# Altium PCB PCBSDC.PcbDoc
Units mm, origin at the board's own origin, x right, y up, seen from the top; angles counter-clockwise.
Board outline 120 x 150 mm, 2 copper layers (Top Layer, Bottom Layer); 28 components, 35 nets, 119 pads, 47 vias.
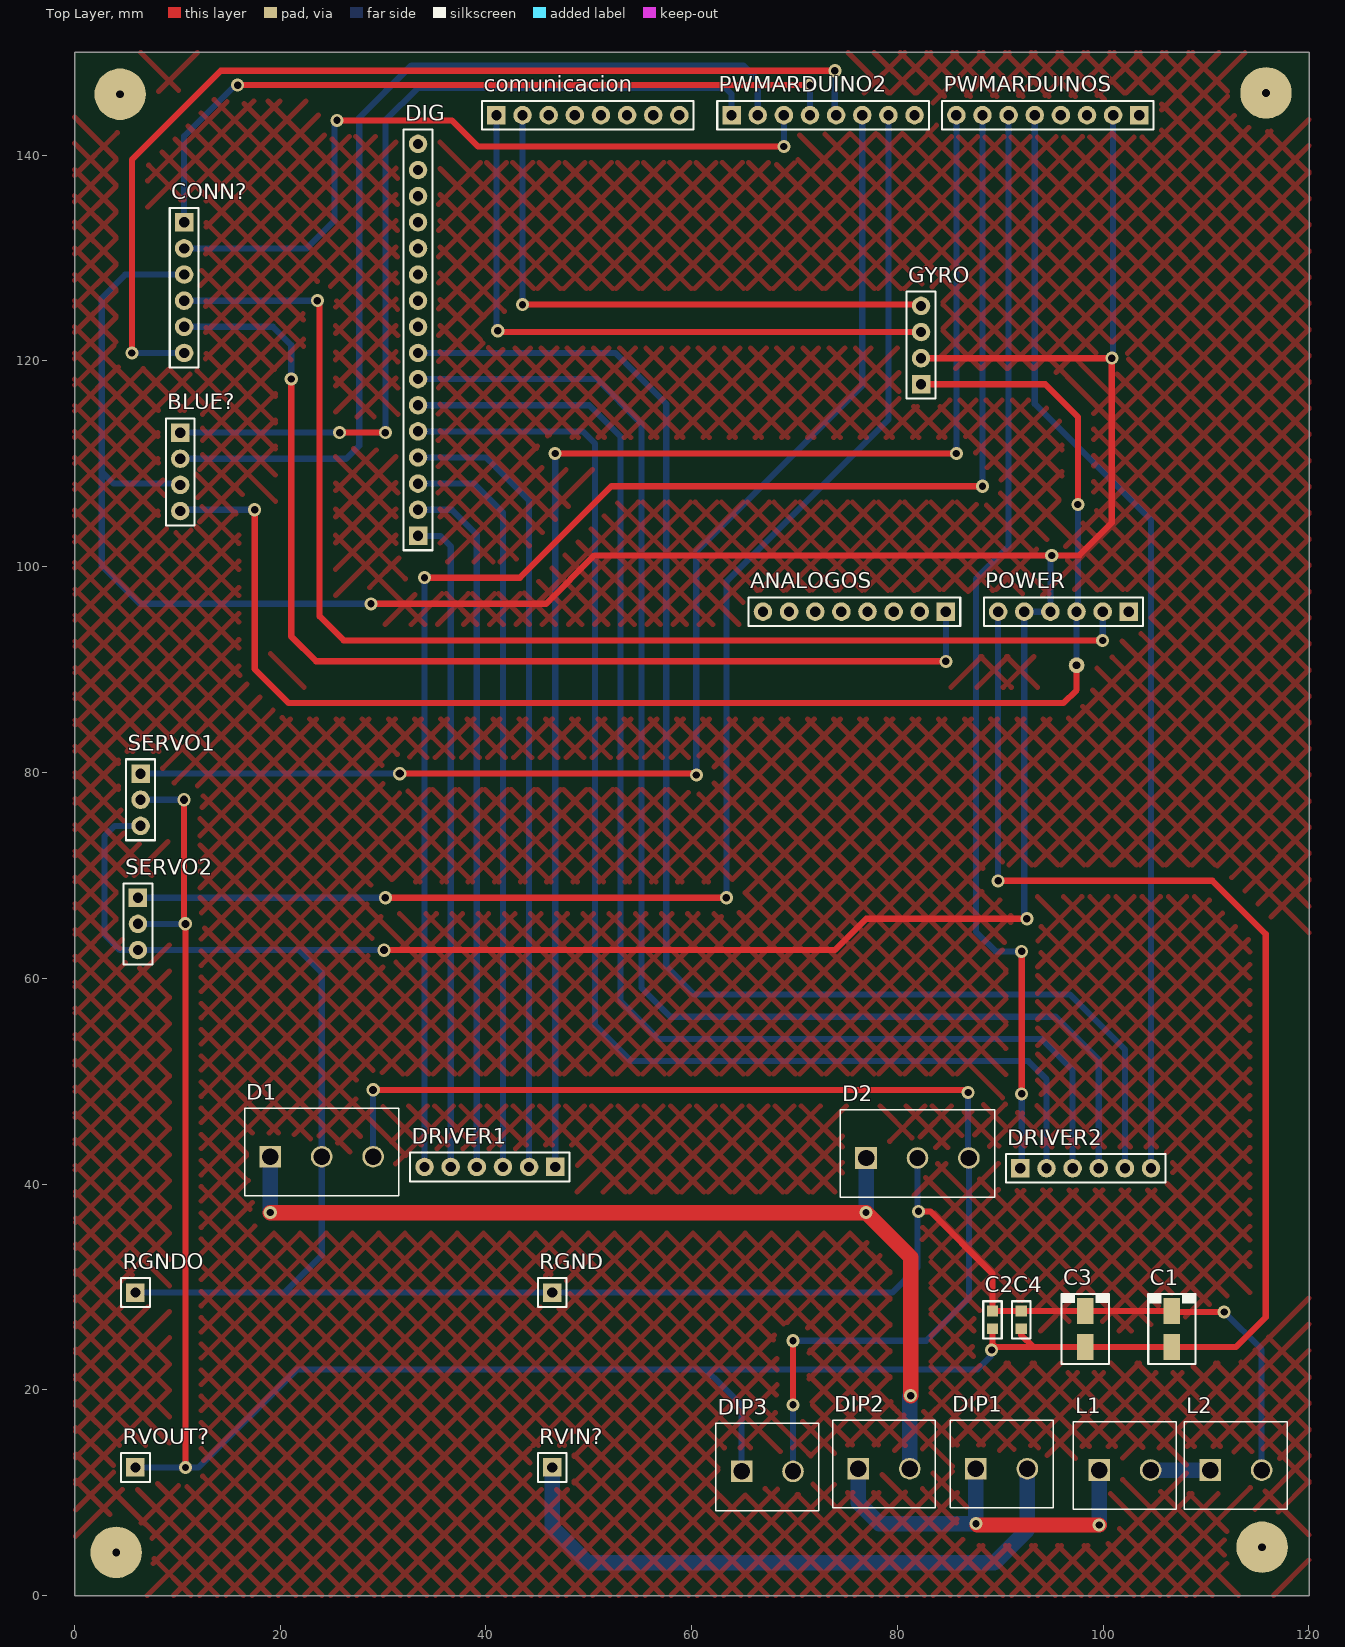
[diagram p0: Top Layer view]
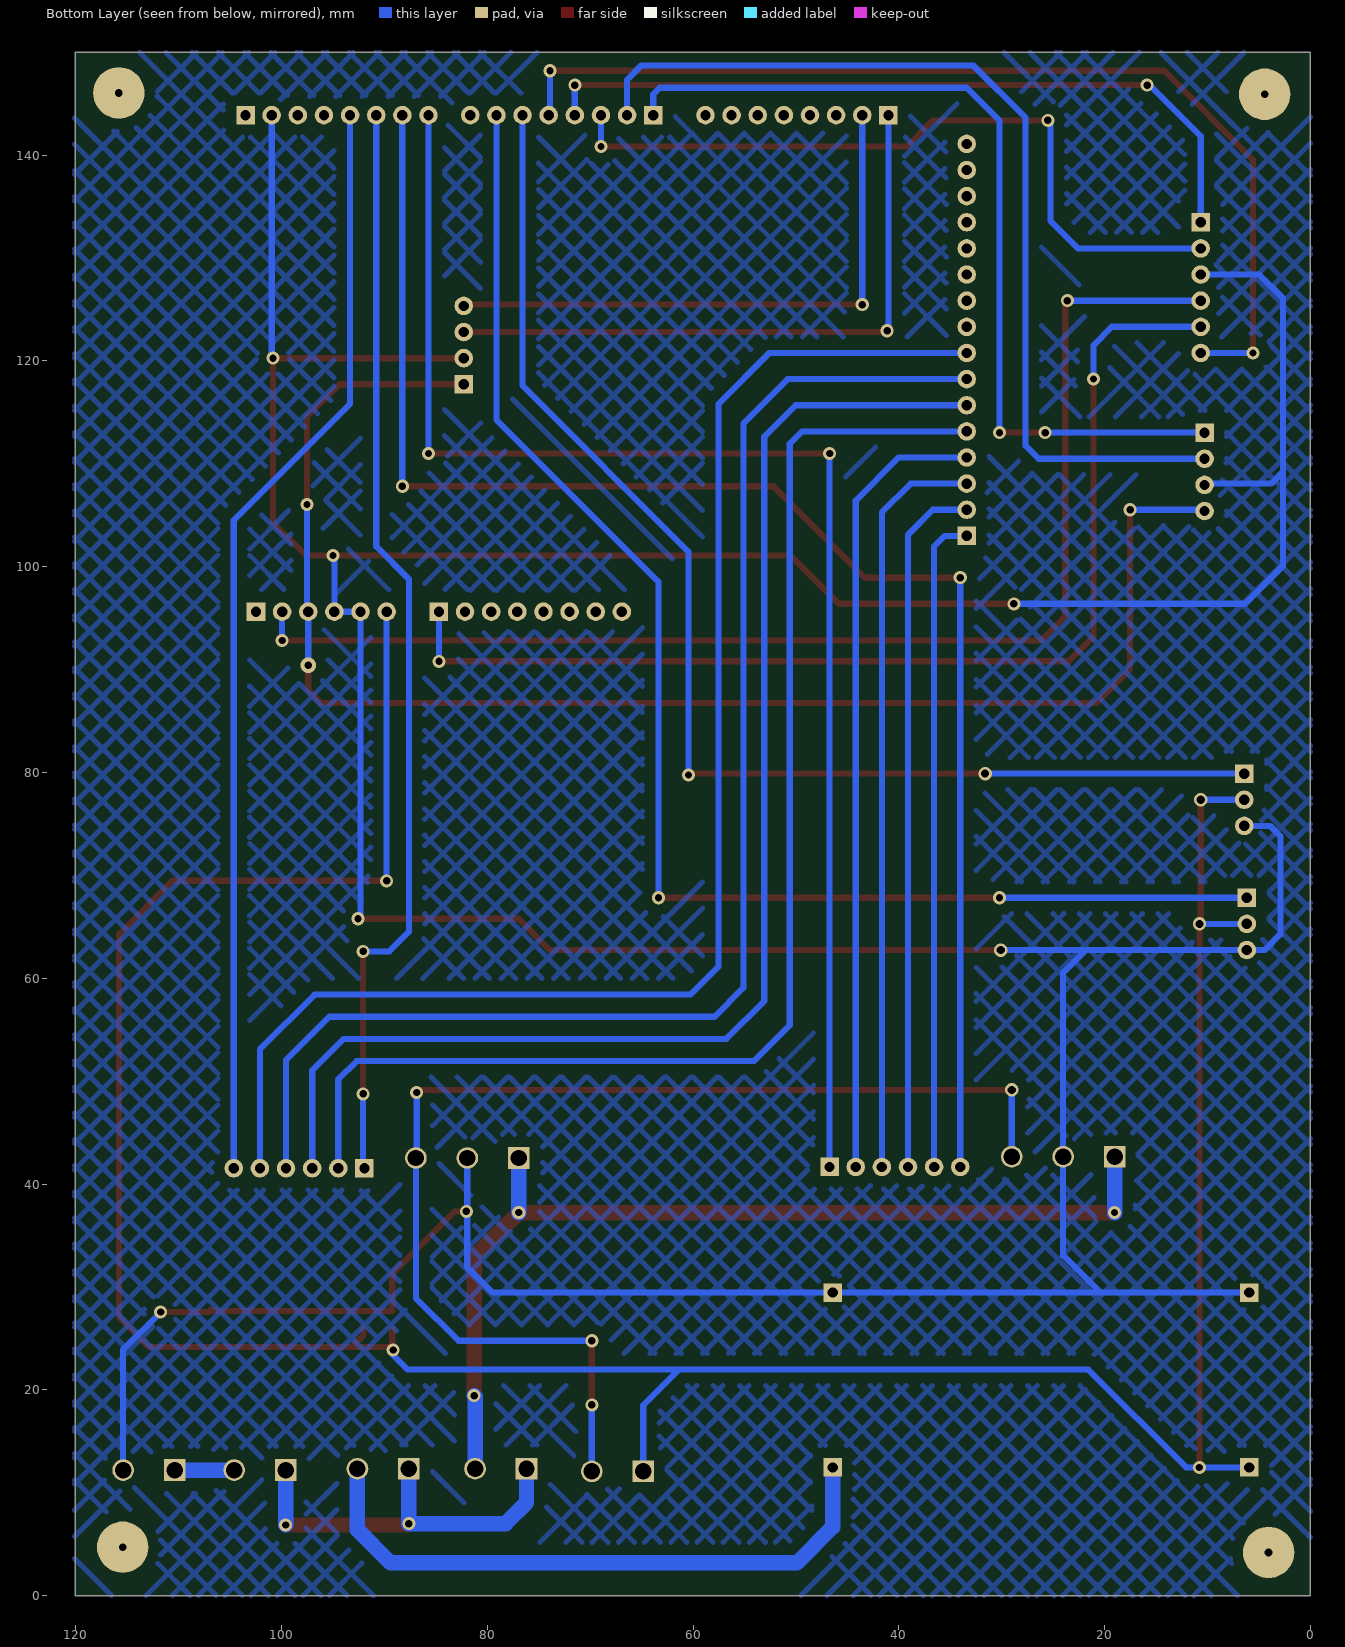
[diagram p1: Bottom Layer view, seen from below]
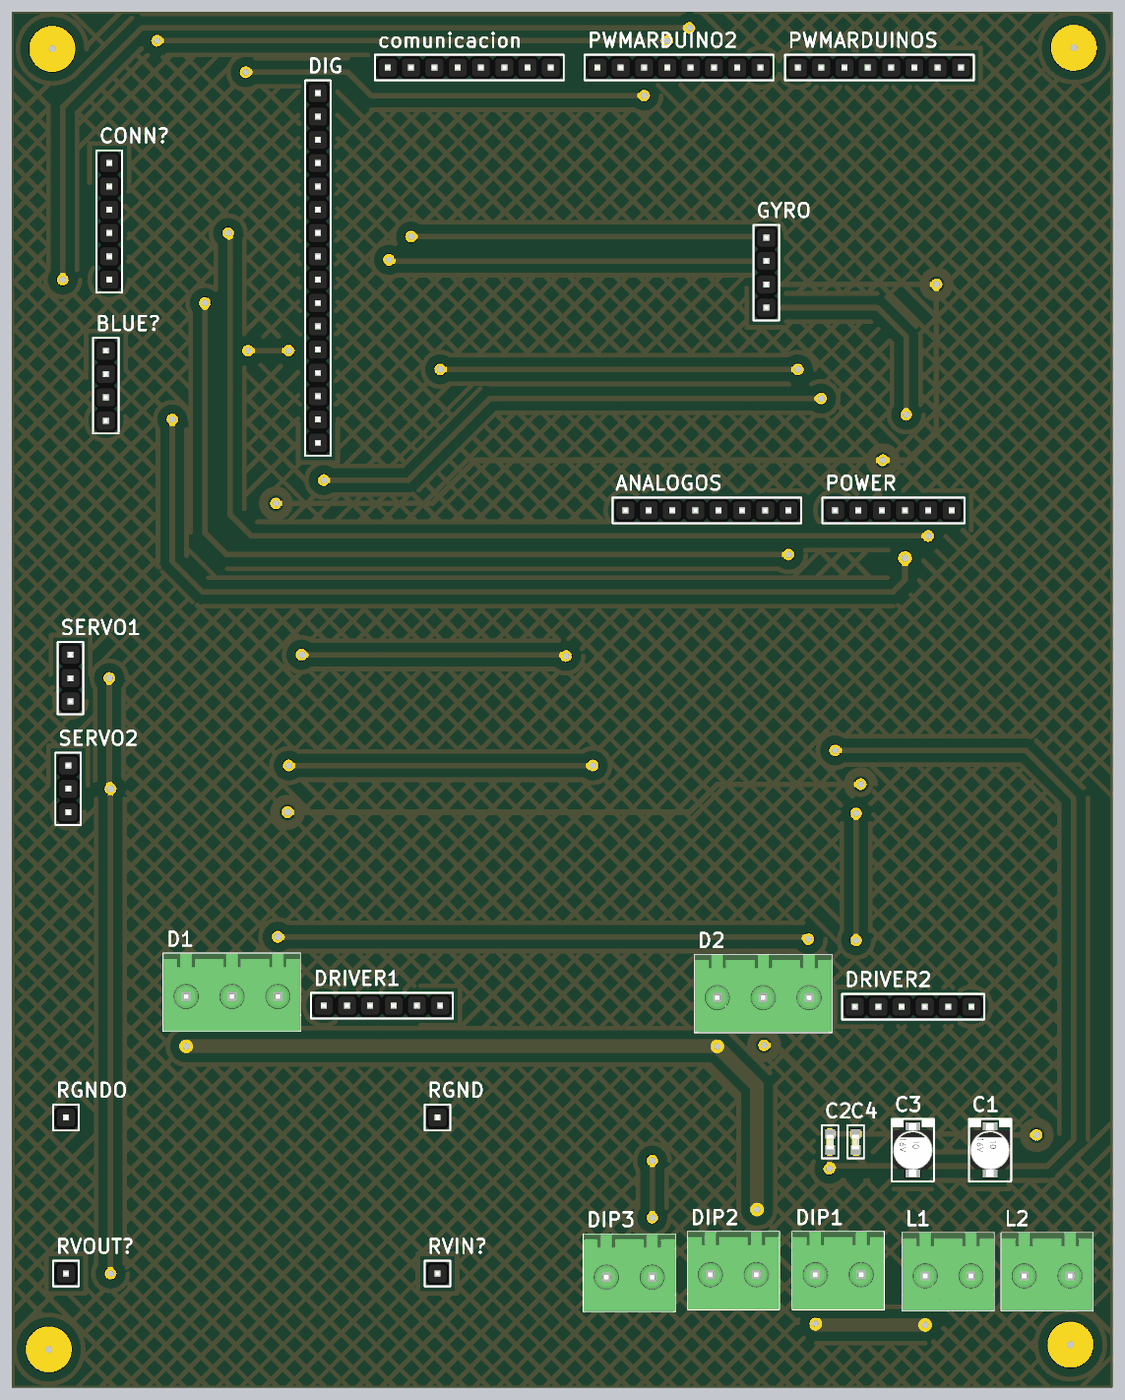
[diagram p2: 3D render of the assembled board from above, using the file's embedded part models]

## Layer stack, top to bottom
Top Solder: solder mask 0.0102, Solder Resist, Dk 3.5
Top Layer: signal copper 0.0356
Dielectric 1: dielectric 0.32, FR-4, Dk 4.8
Bottom Layer: signal copper 0.0356
Bottom Solder: solder mask 0.0102, Solder Resist, Dk 3.5

## Board outline
0.042,-0.007 0.042,149.993 120.042,149.993 120.042,-0.007

## Design rules (kind name [scope] priority, off if disabled: settings)
Clearance MallaC [InPolygon] p1: gap=1 ignorepadtopadclearanceinfootprint=FALSE
Clearance [All] p2: gap=0.254 ignorepadtopadclearanceinfootprint=FALSE except(0: Arc-Hole Track-Hole SMDPad-Hole THPad-Hole Via-Hole Fill-Hole Poly-Hole Region-Hole Text-Hole)
PolygonConnect [All] p1: connectstyle=Relief reliefconductorwidth=0.254 reliefentries=4 polygonreliefangle="90 Angle" airgapwidth=0.254
RoutingVias [All] p1: holewidth=0.711 width=1.27 viastyle="Through Hole" minholewidth=0.711 minwidth=1.27 maxholewidth=0.711 maxwidth=1.27
SolderMaskExpansion [All] p1: expansion=0.102
Width MallaW [InPolygon] p1: maxlimit=1 minlimit=0.2 preferedwidth=0.4
Width [All] p2: maxlimit=2 minlimit=0.5 preferedwidth=1.5
30 further rules are at their usual default settings.

## Components (designator, comment, footprint, x,y, rotation, side; value= is the part's Value field where it differs from the comment)
ANALOGOS "Connector" "1x8x2.54 Pin Header TH V" 75.819,95.631 r180 top
BLUE? "Connector" "1x4x2.54 Pin Header TH V" 10.287,109.22 r270 top
C1 "C Pol" "C Elec SMD 4x5.4-10u-16V" 106.68,25.908 r270 top
C2 "Cap" C0603-0.80 89.239,26.804 r270 top value=10nF
C3 "C Pol" "C Elec SMD 4x5.4-10u-16V" 98.256,25.915 r270 top
C4 "Cap" C0603-0.80 92.033,26.804 r270 top value=10nF
comunicacion "Connector" "1x8x2.54 Pin Header TH V" 49.911,143.891 r0 top
CONN? "Connector" "1x6x2.54 Pin Header TH V" 10.668,127.127 r270 top
D1 "WE-Terminal Blocks Plugable Type 691311700003" 691311700003 24.036,42.656 r0 top
D2 "WE-Terminal Blocks Plugable Type 691311700003" 691311700003 81.948,42.529 r0 top
DIG "Connector" "1x16x2.54 Pin Header TH V" 33.401,102.997 r90 top
DIP1 "WE-Terminal Blocks Plugable Type 691311700002" 691311700002 90.128,12.326 r0 top
DIP2 "WE-Terminal Blocks Plugable Type 691311700002" 691311700002 78.698,12.326 r0 top
DIP3 "WE-Terminal Blocks Plugable Type 691311700002" 691311700002 67.35,12.065 r0 top
DRIVER1 "Connector" "1x6x2.54 Pin Header TH V" 40.386,41.656 r180 top
DRIVER2 "Connector" "1x6x2.54 Pin Header TH V" 98.298,41.529 r0 top
GYRO "Connector" "1x4x2.54 Pin Header TH V" 82.296,121.539 r90 top
L1 "WE-Terminal Blocks Plugable Type 691311700002" 691311700002 102.106,12.199 r0 top
L2 "WE-Terminal Blocks Plugable Type 691311700002" 691311700002 112.901,12.199 r0 top
POWER "Connector" "1x6x2.54 Pin Header TH V" 96.139,95.631 r180 top
PWMARDUINO2 "Connector" "1x8x2.54 Pin Header TH V" 72.771,143.891 r0 top
PWMARDUINOS "Connector" "1x8x2.54 Pin Header TH V" 94.615,143.891 r180 top
RGND "Connector" "1x1x2.54 Pin Header TH V" 46.44,29.453 r270 top
RGNDO "Connector" "1x1x2.54 Pin Header TH V" 5.94,29.453 r270 top
RVIN? "Connector" "1x1x2.54 Pin Header TH V" 46.44,12.453 r270 top
RVOUT? "Connector" "1x1x2.54 Pin Header TH V" 5.94,12.453 r270 top
SERVO1 "Connector" "1x3x2.54 Pin Header TH V" 6.435,77.35 r270 top
SERVO2 "Connector" "1x3x2.54 Pin Header TH V" 6.181,65.285 r270 top

## Footprints (in the part's own frame and the unit in brackets; to place one, negate y for a bottom-side part, rotate by r counter-clockwise, add the part's x,y. Pads: shape width x height; smd on the part's side, far side on the other; paste and mask are expansions set on the pad)
"1x1x2.54 Pin Header TH V" [mm] "1x1x2.54 Pin Header TH V"
  rect 1.8x1.8 hole 1: 1(0,0)
  silkscreen extent -1.4,-1.4 1.4,1.4, body extent -1.27,-1.27 1.27,1.27, height 8.55
"1x3x2.54 Pin Header TH V" [mm] "1x3x2.54 Pin Header TH V"
  rect 1.8x1.8 hole 1: 1(-2.54,0)
  round 1.8 hole 1: 2(0,0) 3(2.54,0)
  silkscreen extent -3.94,-1.4 3.94,1.4, body extent -3.81,-1.27 3.81,1.27, height 8.55
"1x4x2.54 Pin Header TH V" [mm] "1x4x2.54 Pin Header TH V"
  rect 1.8x1.8 hole 1: 1(-3.81,0)
  round 1.8 hole 1: 2(-1.27,0) 3(1.27,0) 4(3.81,0)
  silkscreen extent -5.21,-1.4 5.21,1.4, body extent -5.08,-1.27 5.08,1.27, height 8.55
"1x6x2.54 Pin Header TH V" [mm] "1x6x2.54 Pin Header TH V"
  rect 1.8x1.8 hole 1: 1(-6.35,0)
  round 1.8 hole 1: 2(-3.81,0) 3(-1.27,0) 4(1.27,0) 5(3.81,0) 6(6.35,0)
  silkscreen extent -7.75,-1.4 7.75,1.4, body extent -7.62,-1.27 7.62,1.27, height 8.55
"1x8x2.54 Pin Header TH V" [mm] "1x8x2.54 Pin Header TH V"
  rect 1.8x1.8 hole 1: 1(-8.89,0)
  round 1.8 hole 1: 2(-6.35,0) 3(-3.81,0) 4(-1.27,0) 5(1.27,0) 6(3.81,0) 7(6.35,0) 8(8.89,0)
  silkscreen extent -10.29,-1.4 10.29,1.4, body extent -10.16,-1.27 10.16,1.27, height 8.55
"1x16x2.54 Pin Header TH V" [mm] "1x16x2.54 Pin Header TH V"
  rect 1.8x1.8 hole 1: 1(0,0)
  round 1.8 hole 1: 2(2.54,0) 3(5.08,0) 4(7.62,0) 5(10.16,0) 6(12.7,0) 7(15.24,0) 8(17.78,0) 9(20.32,0) 10(22.86,0) 11(25.4,0) 12(27.94,0) 13(30.48,0) 14(33.02,0) 15(35.56,0) 16(38.1,0)
  silkscreen extent -1.4,-1.4 39.5,1.4, body extent -1.27,-1.27 39.37,1.27, height 8.55
691311700002 [mm] "5.00mm - Open Vertical PCB Header - 02p"
  rect 2.1x2.1 hole 1.6: 1(-2.5,0)
  round 2.1 hole 1.6: 2(2.5,0)
  silkscreen extent -5,-3.8 5,4.7, body extent -5,-3.8 5,4.7, height 12.01
691311700003 [mm] "5.00mm - Open Vertical PCB Header - 03p"
  rect 2.1x2.1 hole 1.6: 1(-5,0)
  round 2.1 hole 1.6: 2(0,0) 3(5,0)
  silkscreen extent -7.5,-3.8 7.5,4.7, body extent -7.5,-3.8 7.5,4.7, height 12.01
C0603-0.80 [mm] "Capacitor Chip 0603 Height 0.80mm"
  rect 1.05x1.08 smd: 1(-0.865,0) 2(0.865,0)
  silkscreen extent -1.8,-0.9 1.8,0.9, body extent -0.8,-0.41 0.8,0.41, height 0.81
"C Elec SMD 4x5.4-10u-16V" [mm] "C Elec SMD 4x5.4, 10uF, 16V"
  rect 2.5x1.6 smd: 1(-1.75,0) 2(1.75,0)
  silkscreen extent -3.4,-2.3 3.4,2.3, body extent -2.91,-2.15 2.91,2.15, height 5.41

## Part data
ANALOGOS comunicacion PWMARDUINO2 PWMARDUINOS: library part "Header 1x8"
BLUE? GYRO: library part "Header 1x4"
C1 C3: "Capacitor, polarized, generic"
C2 C4: "Capacitor", LatestRevisionDate=17-Jul-2002, LatestRevisionNote="Re-released for DXP Platform.", PackageDescription="Radial Cap, Thru-Hole; 2 Leads; 0.3 in Pin Spacing", PackageReference=RAD-0.3, Published=8-Jun-2000, Publisher="Altium Limited"
CONN? DRIVER1 DRIVER2 POWER: library part "Header 1x6"
D1 D2: "WR-TBL Terminal block - serie 3117 - 5.00mm", Manufacturer="Würth Elektronik eiSos GmbH", PartNo=691311700003, ComponentLink1 Description=Manufacturer, ComponentLink1URL=http://www.we-online.com, ComponentLink2 Description=Datasheet, ComponentLink2URL=http://katalog.we-online.de/em/datasheet/6913117000xx.pdf, Created by="Karrer Zheng", Created Date="6 January 2014", NoPins=03
DIG: library part "Header 1x16"
DIP1 DIP2 DIP3 L1 L2: "WR-TBL Terminal block - serie 3117 - 5.00mm", Manufacturer="Würth Elektronik eiSos GmbH", PartNo=691311700002, ComponentLink1 Description=Manufacturer, ComponentLink1URL=http://www.we-online.com, ComponentLink2 Description=Datasheet, ComponentLink2URL=http://katalog.we-online.de/em/datasheet/6913117000xx.pdf, Created by="Karrer Zheng", Created Date="6 January 2014", NoPins=02
RGND RGNDO RVIN? RVOUT?: library part "Header 1x1"
SERVO1 SERVO2: library part "Header 1x3"

## Free pads (board coordinates)
  round 5 hole 0.762: 2(4.445,145.923) 3(115.824,146.05) 4(4.064,4.191) 5(115.443,4.699)
  round 1.524 hole 0.762: 6(97.409,90.424)

## Via types
v1: diameter 1.27, hole 0.711, Top Layer to Bottom Layer, 42 vias
v2: diameter 1.3, hole 0.8, Top Layer to Bottom Layer, 5 vias

## Nets (pads, with @x,y where several pads share a name; then routed paths per layer and width w, separated by ;. In a path a pad name is that pad's centre, name@x,y a point inside that pad or via, vN(x,y) a via of type N, cw(c..) or ccw(c..) an arc to the next point about the centre after c; other vN are vias at no path point)
3.3v: CONN?.4 POWER.2 | length 123.6
  Top Layer w0.6: v1(23.622,125.857) 23.657,125.857 23.83,125.684 23.83,95.169 26.162,92.837 v1(99.949,92.837)
  Bottom Layer w0.6: CONN?.4 v1(23.622,125.857) ; v1(99.949,92.837) POWER.2
5V: BLUE?.4 GYRO.1 pad.6 POWER.3 | length 147.6
  Top Layer w0.6: v1@17.526,105.41 17.526,90.043 20.828,86.741 96.139,86.741 97.409,88.011 pad.6 ; GYRO.1 94.361,117.729 97.536,114.554 v1(97.536,106.045)
  Bottom Layer w0.6: BLUE?.4 10.414,105.537 v1(17.526,105.537) ; pad.6 POWER.3 97.536,95.758 v1(97.536,106.045)
AIN11: DIG.4 DRIVER1.2 | length 77.3
  Bottom Layer w0.6: DIG.4 40.005,110.617 44.196,106.426 DRIVER1.2
AIN12: DIG.3 DRIVER1.3 | length 73
  Bottom Layer w0.6: DIG.3 38.862,108.077 41.656,105.283 DRIVER1.3
AIN21: DIG.2 DRIVER1.4 | length 68.2
  Bottom Layer w0.6: DIG.2 36.703,105.537 39.116,103.124 DRIVER1.4
AIN22: DIG.1 DRIVER1.5 | length 63.9
  Bottom Layer w0.6: DIG.1 35.56,102.997 36.576,101.981 DRIVER1.5
ATTENTION: ANALOGOS.1 CONN?.5 | length 109.1
  Top Layer w0.6: v1(21.082,118.237) 21.082,93.218 23.495,90.805 v1(84.709,90.805)
  Bottom Layer w0.6: CONN?.5 19.304,123.317 21.082,121.539 v1(21.082,118.237) ; v1@84.709,90.678 v1(84.709,90.805) ANALOGOS.1
BIN11: DIG.5 DRIVER2.2 | length 128.9
  Bottom Layer w0.6: DIG.5 49.403,113.157 50.609,111.95 50.609,55.435 54.102,51.943 92.71,51.943 94.488,50.165 DRIVER2.2
BIN12: DIG.6 DRIVER2.3 | length 132.1
  Bottom Layer w0.6: DIG.6 50.038,115.697 53.086,112.649 53.086,57.785 56.769,54.102 93.98,54.102 97.028,51.054 DRIVER2.3
BIN21: DIG.7 DRIVER2.4 | length 136.3
  Bottom Layer w0.6: DIG.7 50.8,118.237 55.118,113.919 55.118,59.055 57.912,56.261 95.377,56.261 99.568,52.07 DRIVER2.4
BIN22: DIG.8 DRIVER2.5 | length 140.3
  Bottom Layer w0.6: DIG.8 52.578,120.777 57.531,115.824 57.531,61.151 60.261,58.42 96.774,58.42 102.108,53.086 DRIVER2.5
CLOCK: CONN?.6 PWMARDUINO2.5 | length 100.1
  Top Layer w0.6: v1(5.588,120.777) 5.588,139.573 14.224,148.209 v1(73.914,148.209)
  Bottom Layer w0.6: v1(5.588,120.777) CONN?.6 ; v1(73.914,148.209) 73.914,144.018 PWMARDUINO2.5
COMMAND: CONN?.2 PWMARDUINO2.3 | length 73.4
  Top Layer w0.6: v1@25.273,143.383 v1(25.527,143.383) 36.703,143.383 39.243,140.843 v1(68.961,140.843)
  Bottom Layer w0.6: CONN?.2 22.606,130.937 25.273,133.604 25.273,143.129 v1(25.527,143.383) ; v1(68.961,140.843) PWMARDUINO2.3
DATA: CONN?.1 PWMARDUINO2.4 | length 74.2
  Top Layer w0.6: v1(15.875,146.812) v1(71.501,146.812)
  Bottom Layer w0.6: CONN?.1 10.668,141.859 15.621,146.812 v1(15.875,146.812) ; PWMARDUINO2.4 v1(71.501,146.812)
GND: BLUE?.3 C1.1 C2.1 C3.1 C4.1 CONN?.3 D1.2 D2.2 GYRO.2 L2.2 POWER.4 POWER.5 PWMARDUINOS.2 RGND.1 RGNDO.1 SERVO1.3 SERVO2.3 | length 524.1
  Top Layer w0.5: C3.1 C3.1@98.263,27.658
  Top Layer w0.6: v1(28.829,96.393) 45.847,96.393 50.546,101.092 v1(94.996,101.092) 97.663,101.092 100.838,104.267 v1(100.838,120.269) GYRO.2 ; v2(30.099,62.738) 73.914,62.738 76.962,65.786 v1(92.583,65.786) ; v1@81.915,37.338 v1(82.042,37.338) 83.185,37.338 89.239,31.284 C2.1 C4.1 106.669,27.669 C1.1 106.835,27.813 107.089,27.559 v1(111.76,27.559)
  Bottom Layer w0.5: L2.2@115.316,12.284 L2.2
  Bottom Layer w0.6: RGNDO.1 20.447,29.453 ; SERVO1.3 3.93,74.81 2.914,73.794 2.914,64.262 4.431,62.745 SERVO2.3 21.844,62.745 ; BLUE?.3 10.16,108.077 3.81,108.077 2.667,109.22 ; CONN?.3 4.953,128.397 2.667,126.111 2.667,109.22 ; v1(28.829,96.393) 6.35,96.393 2.667,100.076 2.667,109.22 ; v2@30.353,62.745 21.844,62.745 ; D2.2 81.948,31.91 79.491,29.453 RGND.1 20.447,29.453 ; v1(92.583,65.786) 92.329,66.04 POWER.5 POWER.4 v1@94.869,101.219 ; v1@100.965,120.269 PWMARDUINOS.2 ; v1(111.76,27.559) 115.401,23.918 L2.2 ; 20.447,29.453 20.447,29.464 24.036,33.053 D1.2 24.036,60.553 21.844,62.745
LED3: PWMARDUINOS.4
LED4: PWMARDUINOS.3
LED5: DIG.9
LED6: DIG.10
NetL1_2: L1.2 L2.1 | length 5.8
  Bottom Layer w1.5: L1.2 L2.1
PWMA1: DRIVER1.1 PWMARDUINOS.8 | length 141.2
  Top Layer w0.6: v1(46.736,110.998) v1(85.725,110.998)
  Bottom Layer w0.6: DRIVER1.1 v1(46.736,110.998) ; v1(85.725,110.998) PWMARDUINOS.8
PWMA2: DRIVER1.6 PWMARDUINOS.7 | length 151.3
  Top Layer w0.6: v1(34.036,98.933) 43.307,98.933 52.197,107.823 v1(88.265,107.823)
  Bottom Layer w0.6: DRIVER1.6 v1(34.036,98.933) ; v1(88.265,107.823) PWMARDUINOS.7
PWMB1: DRIVER2.1 PWMARDUINOS.6 | length 107.1
  Top Layer w0.6: v1(92.075,48.768) v1(92.075,62.611)
  Bottom Layer w0.6: PWMARDUINOS.6 90.805,101.981 87.63,98.806 87.63,64.516 89.535,62.611 v1(92.075,62.611) ; DRIVER2.1 92.075,41.656 v1(92.075,48.768)
PWMB2: DRIVER2.6 PWMARDUINOS.5 | length 107
  Bottom Layer w0.6: PWMARDUINOS.5 93.345,115.824 104.648,104.521 DRIVER2.6
RX: BLUE?.1 PWMARDUINO2.1 | length 87.6
  Top Layer w0.6: v1(25.781,113.03) v1(30.226,113.03)
  Bottom Layer w0.6: BLUE?.1 v1(25.781,113.03) ; v1(30.226,113.03) 30.226,143.383 33.401,146.558 63.246,146.558 63.881,145.923 PWMARDUINO2.1
SCL: comunicacion.1 GYRO.3 | length 62.2
  Top Layer w0.6: v1(41.148,122.936) 41.275,122.809 GYRO.3
  Bottom Layer w0.6: comunicacion.1 41.021,123.063 v1(41.148,122.936)
SDA: comunicacion.2 GYRO.4 | length 57.2
  Top Layer w0.6: v1(43.561,125.476) 82.169,125.476 GYRO.4
  Bottom Layer w0.6: v1(43.561,125.476) comunicacion.2
SERVO1: PWMARDUINO2.6 SERVO1.1 | length 125.1
  Top Layer w0.6: v2(31.623,79.89) 60.318,79.89 v1(60.452,79.756)
  Bottom Layer w0.6: SERVO1.1 v2(31.623,79.89) v2@31.884,79.89 ; v1(60.452,79.756) 60.452,101.473 76.581,117.602 PWMARDUINO2.6
SERVO2: PWMARDUINO2.7 SERVO2.1 | length 139.8
  Top Layer w0.6: v1(30.226,67.825) v1(63.373,67.825)
  Bottom Layer w0.6: SERVO2.1 v1(30.226,67.825) ; v1@63.373,67.818 v1(63.373,67.825) 63.373,98.552 79.121,114.3 PWMARDUINO2.7
TX: BLUE?.2 PWMARDUINO2.2 | length 94.6
  Bottom Layer w0.6: BLUE?.2 26.416,110.49 27.686,111.76 27.686,143.637 32.766,148.717 65.024,148.717 66.421,147.32 PWMARDUINO2.2
VCC: C1.2 C2.2 C3.2 C4.2 DIP3.1 POWER.6 RVOUT?.1 SERVO1.2 SERVO2.2 | length 296.9
  Top Layer w0.6: v2(10.661,77.35) 10.661,65.412 v2(10.788,65.285) v1@10.788,12.693 ; v1(89.154,23.876) 89.154,24.341 v1@89.239,24.426 ; C2.2 v1@89.239,24.426 ; v1(89.789,69.469) 110.617,69.469 115.796,64.29 115.796,27.051 112.903,24.158 C1.2 98.263,24.158 C3.2 93.183,24.165 ; C4.2 92.033,25.315 93.183,24.165 ; v1@89.239,24.426 89.5,24.165 93.183,24.165
  Bottom Layer w0.6: RVOUT?.1 v1(10.802,12.453) 12.072,12.453 21.59,21.971 61.383,21.971 ; SERVO2.2 v2(10.788,65.285) ; SERVO1.2 v2(10.661,77.35) ; DIP3.1 64.85,18.504 62.865,20.489 61.383,21.971 ; v1(89.154,23.876) 89.154,23.368 87.757,21.971 61.383,21.971 ; v1(89.789,69.469) POWER.6
VCCD: D1.3 D2.3 DIP3.2 | length 116.5
  Top Layer w0.6: v2(29.036,49.149) 86.614,49.149 v1(86.868,48.895) ; v1(69.85,18.542) v1(69.85,24.765)
  Bottom Layer w0.6: D1.3 v2(29.036,49.149) ; DIP3.2 v1(69.85,18.542) ; v1(69.85,24.765) 82.804,24.765 86.948,28.909 D2.3 86.868,42.609 v1(86.868,48.895) ; v2(29.036,49.149) 29.036,49.309 29.21,49.309 29.05,49.149 v2(29.036,49.149)
VDIP: DIP1.1 DIP2.1 L1.1 | length 38.4
  Top Layer w1: v1(87.628,6.985) v1@87.755,6.858
  Top Layer w1.5: v1@87.755,6.858 v1(99.606,6.858)
  Bottom Layer w0.5: L1.1 L1.1@99.695,12.11
  Bottom Layer w1.5: DIP2.1 76.198,9.019 78.232,6.985 v1(87.628,6.985) DIP1.1 ; v1(99.606,6.858) L1.1
VDRIVER: D1.1 D2.1 DIP2.2 | length 95.4
  Top Layer w1.5: v1(19.036,37.225) v1(76.948,37.225) 81.28,32.893 v1(81.28,19.431)
  Bottom Layer w1.5: v1(19.036,37.225) D1.1 ; v1(76.948,37.225) D2.1 ; DIP2.2 81.198,19.349 v1(81.28,19.431)
VL: DIP1.2 RVIN?.1 | length 60.7
  Bottom Layer w1.5: RVIN?.1 46.44,6.646 49.911,3.175 89.408,3.175 92.628,6.395 DIP1.2
pads on no net: ANALOGOS.2 ANALOGOS.3 ANALOGOS.4 ANALOGOS.5 ANALOGOS.6 ANALOGOS.7 ANALOGOS.8 comunicacion.3 comunicacion.4 comunicacion.5 comunicacion.6 comunicacion.7 comunicacion.8 DIG.11 DIG.12 DIG.13 DIG.14 DIG.15 DIG.16 POWER.1 PWMARDUINO2.8 PWMARDUINOS.1

## Polygon pours and split planes (outlines as drawn)
GND on Top Layer "Bottom Layer-No Net" (hatched 45Degree grid 1.8 track 0.5, pour order 12): 0,149.987 120.015,149.987 120.015,0 0.127,0
GND on Bottom Layer "Bottom Layer-No Net" (hatched 45Degree grid 1.8 track 0.5, pour order 14): 0,149.987 120.142,149.987 120.142,0 0,0

## Silkscreen, mask and mechanical layers (free items; w line width, h text height)
Mechanical 1:
  the board outline again, w0.254